# EAGLE board brick_i2c_oled (EAGLE 7.4.0)
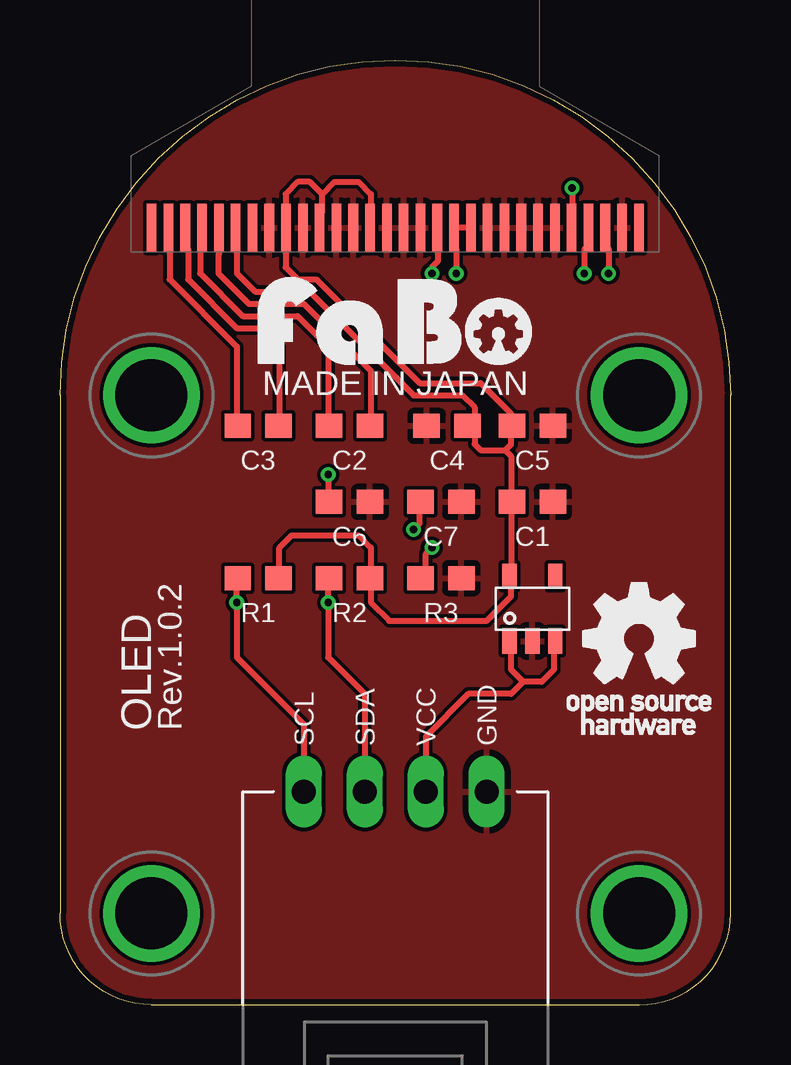
[diagram p0: board, top side]
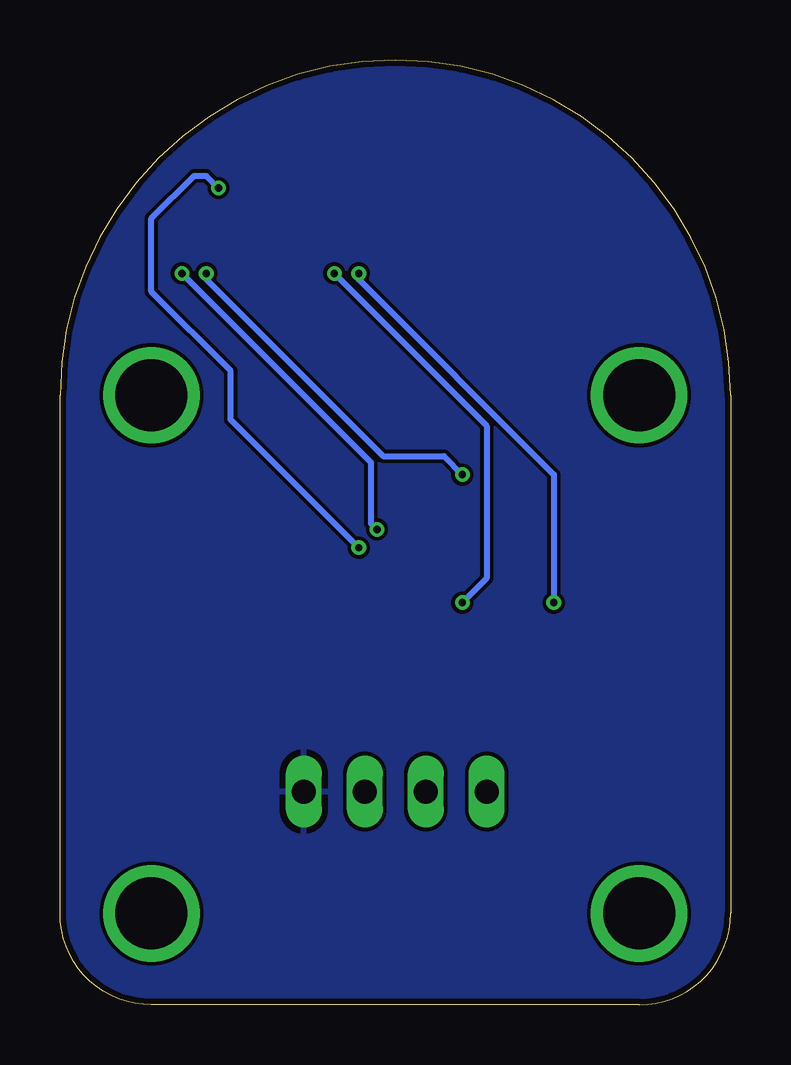
[diagram p1: board, bottom side, seen from below]

Size 27.94 x 39.37 mm. Coordinates in mm from the lower left corner, seen from the top.
Copper layers (1*16): Top 0.035mm / dielectric 1.5mm / Bottom 0.035mm
Design rules "Elecrow_2-layer_eagle_rule": minimum track width 6mil, minimum drill 12mil, track to track 6mil, track to pad 6mil, pad to pad 6mil, via to via 6mil, smd to smd 0mil, copper to edge 10mil, drill to drill 10mil, minimum pad ring 10mil, minimum via ring 6mil, stop-mask expansion 2mil, vias tented up to drill 100mil, thermal gap 10mil

## Footprints (pad centres in the part's own frame; a part is rotated, then mirrored left to right if it is on the bottom)
EIA0603 = smd 1.1 x 1: 1 -0.85,0; 2 0.85,0
TI-LP2985 = smd 0.6 x 1.05: 1 -0.95,-1.35; 2 0,-1.35; 3 0.95,-1.35; 4 0.95,1.35; 5 -0.95,1.35
FABO_BRICK_I2C = drill 1 long: GND 3.81,-10.16; SCL -3.81,-10.16; SDA -1.27,-10.16; VCC 1.27,-10.16 | drill 3 pad 3.81: P$1 -10.16,6.35; P$2 10.16,6.35; P$3 -10.16,-15.24; P$4 10.16,-15.24
ER-OLED0.96-1 = smd 0.4 x 2: 1 -10.15,0; 2 -9.45,0; 3 -8.75,0; 4 -8.05,0; 5 -7.35,0; 6 -6.65,0; 7 -5.95,0; 8 -5.25,0; 9 -4.55,0; 10 -3.85,0; 11 -3.15,0; 12 -2.45,0; 13 -1.75,0; 14 -1.05,0; 15 -0.35,0; 16 0.35,0; 17 1.05,0; 18 1.75,0; 19 2.45,0; 20 3.15,0; 21 3.85,0; 22 4.55,0; 23 5.25,0; 24 5.95,0; 25 6.65,0; 26 7.35,0; 27 8.05,0; 28 8.75,0; 29 9.45,0; 30 10.15,0

## Placement (x,y rotation side)
C1  1uF  [EIA0603]  19.68,20.95 0 top
C2  1uF  [EIA0603]  12.06,24.13 0 top
C3  1uF  [EIA0603]  8.26,24.13 0 top
C4  1uF  [EIA0603]  16.13,24.13 180 top
C5  1uF  [EIA0603]  19.68,24.13 0 top
C6  10uF  [EIA0603]  12.06,20.95 0 top
C7  10uF  [EIA0603]  15.88,20.95 0 top
IC1  [TI-LP2985]  19.68,16.51 0 top
J1  [FABO_BRICK_I2C]  13.97,19.05 0 top
R1  4.7k  [EIA0603]  8.26,17.78 0 top
R2  4.7k  [EIA0603]  12.06,17.78 0 top
R3  390k  [EIA0603]  15.88,17.78 180 top
U1  [ER-OLED0.96-1]  13.97,32.38 0 top
U$2  [LOGO_OSHW_T_M]  24.13,15.24 0 top
U$3  [LOGO_FABO_M]  13.97,26.67 0 top

## Library data of the parts
C1-C7 R1-R3 U$2 U$3 = FaBo-etc
IC1 = FaBo-Supply
J1 = FaBo-Template
U1 = FaBo-Parts

## Nets
3V3: C1.1 C4.1 C5.1 IC1.5 R1.2 R2.2 U1.6 U1.9 U1.11 U1.14
5V: IC1.1 IC1.3 J1.VCC
GND: C1.2 C4.2 C5.2 C6.2 C7.2 IC1.2 J1.GND R3.1 U1.8 U1.10 U1.12 U1.13 U1.15 U1.16 U1.17 U1.21 U1.22 U1.23 U1.24 U1.25 U1.29
N$1: C2.1 U1.4
N$2: C2.2 U1.5
N$3: C3.2 U1.3
N$4: C3.1 U1.2
N$5: R3.2 U1.26
N$6: C6.1 U1.27
N$7: C7.1 U1.28
SCL: J1.SCL R1.1 U1.18
SDA: J1.SDA R2.1 U1.19 U1.20

## Tracks (layer width: path | path; a pad name or v marks a point on that pad's centre or on a via)
3V3
  Top 0.254: C4.1 17.27,24.38 | U1.6 7.32,31.8 7.37,31.75 7.37,30.48 8.13,29.72 10.41,29.72 14.73,25.4 16.76,25.4 17.27,24.89 17.27,24.38 | 17.27,24.38 17.27,23.37 17.53,23.11 18.54,23.11 | 18.54,23.11 18.8,22.86 18.8,20.99 C1.1 18.84,20.87 18.8,20.83 18.8,18.05 IC1.5 18.8,17.8 18.8,17.02 17.78,16 13.72,16 12.95,16.76 12.95,17.53 | 18.54,23.11 18.8,23.37 18.8,24.09 C5.1 18.8,24.17 18.8,24.64 17.53,25.91 14.99,25.91 10.67,30.23 9.91,30.23 9.4,30.73 9.4,31.5 9.42,31.52 U1.9 9.4,32.41 9.4,33.78 9.91,34.29 10.41,34.29 10.92,33.78 | 10.92,33.27 10.82,33.17 U1.11 10.82,32.92 10.92,33.02 10.92,33.27 | 10.92,33.27 10.92,33.78 | 10.92,33.78 11.43,34.29 12.45,34.29 12.95,33.78 12.95,32.42 U1.14 | R2.2 12.91,17.57 12.95,17.53 | R1.2 9.11,17.57 9.14,17.53 9.14,19.05 9.65,19.56 12.45,19.56 12.95,19.05 12.95,17.53
5V
  Top 0.254: IC1.3 20.64,14.79 20.57,14.73 20.57,13.97 20.07,13.46 19.3,13.46 | 19.3,13.46 18.8,13.97 18.8,15.1 IC1.1 | 19.3,13.46 18.8,12.95 17.02,12.95 15.24,11.18 J1.VCC
GND
  pour Bottom: -1.27,-1.27 29.21,-1.27 29.21,40.64 -1.27,40.64
  pour Top: -1.27,-1.27 29.21,-1.27 29.21,40.64 -1.27,40.64
N$1
  Top 0.254: U1.4 5.92,31.57 5.84,31.5 5.84,30.48 7.62,28.7 9.91,28.7 11.18,27.43 11.18,24.17 C2.1
N$2
  Top 0.254: U1.5 6.62,31.26 6.6,31.24 6.6,30.48 7.87,29.21 10.16,29.21 12.95,26.42 12.95,24.17 C2.2
N$3
  Top 0.254: U1.3 5.22,31.61 5.33,31.5 5.33,30.23 7.37,28.19 8.38,28.19 9.14,27.43 9.14,24.17 C3.2
N$4
  Top 0.254: U1.2 4.52,31.55 4.57,31.5 4.57,30.23 7.37,27.43 7.37,24.17 C3.1
N$5  (via drill 0.3)
  Top 0.254: R3.2 15.03,17.82 15.24,18.03 15.24,18.8 v15.49,19.05 | v21.34,34.04 21.34,32.4 U1.26
  Bottom 0.254: v15.49,19.05 20.83,24.38 20.83,26.42 24.13,29.72 24.13,32.77 22.35,34.54 21.84,34.54 v21.34,34.04
N$6  (via drill 0.3)
  Top 0.254: U1.27 22.02,31.57 22.1,31.5 21.84,31.5 v21.84,30.48 | v11.18,22.1 11.18,20.92 C6.1
  Bottom 0.254: v21.84,30.48 21.84,30.23 14.48,22.86 11.94,22.86 v11.18,22.1
N$7  (via drill 0.3)
  Top 0.254: U1.28 22.72,31.64 22.86,31.5 v22.86,30.48 | v14.73,19.81 14.99,20.07 14.99,20.92 C7.1
  Bottom 0.254: v22.86,30.48 14.99,22.61 14.99,20.07 v14.73,19.81
SCL  (via drill 0.3)
  Top 0.254: U1.18 15.72,31.52 15.75,31.5 15.75,30.99 15.49,30.73 v15.49,30.48 | R1.1 7.37,17.74 v7.37,16.76 7.37,14.48 10.16,11.68 J1.SCL
  Bottom 0.254: v15.49,30.48 15.49,30.23 7.37,22.1 v7.37,16.76
SDA  (via drill 0.3)
  Top 0.254: U1.20 U1.19 16.42,31.59 16.51,31.5 v16.51,30.48 | R2.1 11.18,17.74 v11.18,16.76 11.18,14.48 12.7,12.95 J1.SDA
  Bottom 0.254: v16.51,30.48 10.16,24.13 10.16,17.78 v11.18,16.76

## Text on the board
tPlace: MADE IN JAPAN | OLED | Rev.1.0.2